# EAGLE board CT_schematic (EAGLE 7.6.0)

Size 100 x 80 mm. Coordinates in mm from the lower left corner, seen from the top.
Outline: 0,0 100,0 100,80 0,80 0,0
Copper layers (1*16): Top 0.035mm / dielectric 1.5mm / Bottom 0.035mm
Design rules "default": minimum track width 10mil, minimum drill 24mil, track to track 8mil, track to pad 8mil, pad to pad 8mil, via to via 8mil, smd to smd 8mil, copper to edge 40mil, drill to drill 8mil, minimum pad ring 10mil, minimum via ring 8mil, stop-mask expansion 4mil, vias tented up to drill 0mil, thermal gap 10mil

## Footprints (pad centres in the part's own frame; a part is rotated, then mirrored left to right if it is on the bottom)
C0603 = smd 0.8 x 0.8: 1 -0.762,0; 2 0.762,0
C0402 = smd 0.5 x 0.5: 1 -0.508,0; 2 0.508,0
EXV-9B = smd 2.718 x 1.778: 1 -2.108,0; 2 2.108,0
EXV-9H = smd 3.505 x 1.676: 1 -2.857,0; 2 2.857,0
L0603 = smd 0.8 x 0.8: 1 -0.762,0; 2 0.762,0
PJ-037B_PACKAGE = drill 3.7 square: 1 12,0 | drill 3.2 square: 2 6,0
R0603 = smd 0.8 x 0.8: 1 -0.762,0; 2 0.762,0
UFQFPN32 = smd 0.6 x 0.3: 1 -2.35,1.75; 2 -2.35,1.25; 3 -2.35,0.75; 4 -2.35,0.25; 5 -2.35,-0.25; 6 -2.35,-0.75; 7 -2.35,-1.25; 8 -2.35,-1.75; 17 2.35,-1.75; 18 2.35,-1.25; 19 2.35,-0.75; 20 2.35,-0.25; 21 2.35,0.25; 22 2.35,0.75; 23 2.35,1.25; 24 2.35,1.75 | smd 0.3 x 0.6: 9 -1.75,-2.35; 10 -1.25,-2.35; 11 -0.75,-2.35; 12 -0.25,-2.35; 13 0.25,-2.35; 14 0.75,-2.35; 15 1.25,-2.35; 16 1.75,-2.35; 25 1.75,2.35; 26 1.25,2.35; 27 0.75,2.35; 28 0.25,2.35; 29 -0.25,2.35; 30 -0.75,2.35; 31 -1.25,2.35; 32 -1.75,2.35 | smd 3.45 x 3.45: EPAD 0,0
SOIC-8 = smd 1.6 x 0.6: 1 -2.7,1.905 | smd 1.55 x 0.6: 2 -2.7,0.635; 3 -2.7,-0.635; 4 -2.7,-1.905; 5 2.7,-1.905; 6 2.7,-0.635; 7 2.7,0.635; 8 2.7,1.905
SAMTEC_FTSH-105-01-L-DV-K = smd 0.762 x 2.794: 1 -2.54,-2.032; 2 -2.54,2.032; 3 -1.27,-2.032; 4 -1.27,2.032; 5 0,-2.032; 6 0,2.032; 7 1.27,-2.032; 8 1.27,2.032; 9 2.54,-2.032; 10 2.54,2.032
TDFN-8/6MM = smd 0.3 x 0.75: 1 0,0; 2 0.5,0; 3 1,0; 4 1.5,0; 5 1.5,3; 6 1,3; 7 0.5,3; 8 0,3
ABS07-32.768KHZ-7-T = smd 1.1 x 2.4: 1 -2.5,0; 2 0,0
LP2954 = smd 1.6 x 0.6: 1 -2.475,1.905 | smd 1.55 x 0.6: 2 -2.475,0.635; 3 -2.475,-0.635; 4 -2.475,-1.905; 5 2.475,-1.905; 6 2.475,-0.635; 7 2.475,0.635; 8 2.475,1.905
SON-6 = smd 0.55 x 0.3: 1 -0.355,0.5 | smd 0.52 x 0.3: 2 -0.37,0; 3 -0.37,-0.5; 4 0.37,-0.5; 5 0.37,0; 6 0.37,0.5
SW_4-1437565-2 = smd 1.4 x 2.1: 1 -2.23,4.55; 2 -2.23,-4.55; 3 2.23,4.55; 4 2.23,-4.55
LGM67K-G1J2-24-Z = smd 0.8 x 1.4: A -2,0; C 0,0
NC7SZ125M5X = smd 1.3 x 0.7: 1 -1.3,0.95; 2 -1.3,0; 3 -1.3,-0.95; 4 1.3,-0.95; 5 1.3,0.95

## Placement (x,y rotation side)
C1  1e-07  [C0603]  -38.1,58.42 0 top  (outside the outline)
C2  1e-07  [C0603]  -41.91,58.42 0 top  (outside the outline)
C3  1e-07  [C0603]  -45.72,58.42 0 top  (outside the outline)
C4  1e-07  [C0603]  -49.53,58.42 0 top  (outside the outline)
C5  4.7e-06  [C0603]  -34.29,58.42 0 top  (outside the outline)
C6  1e-07  [C0603]  -53.34,58.42 0 top  (outside the outline)
C7  1e-08  [C0603]  -57.15,58.42 0 top  (outside the outline)
C8  1e-06  [C0603]  -60.96,58.42 0 top  (outside the outline)
C9  1e-11  [C0402]  -38.1,63.5 0 top  (outside the outline)
C10  1e-11  [C0402]  -41.91,63.5 0 top  (outside the outline)
C11  1e-08  [C0402]  -45.72,63.5 0 top  (outside the outline)
C12  1e-07  [C0402]  -49.53,63.5 0 top  (outside the outline)
C13  1e-08  [C0402]  -53.34,63.5 0 top  (outside the outline)
C14  1e-06  [EXV-9B]  -60.96,39.37 0 top  (outside the outline)
C15  2.2e-06  [EXV-9B]  -16.51,46.99 0 top  (outside the outline)
C16  1e-07  [C0402]  -57.15,63.5 0 top  (outside the outline)
C17  0.0001  [EXV-9H]  -52.07,30.48 0 top  (outside the outline)
C18  0.0001  [EXV-9H]  -17.78,40.64 0 top  (outside the outline)
C19  1e-08  [C0402]  -60.96,63.5 0 top  (outside the outline)
C20  1e-08  [C0402]  -64.77,63.5 0 top  (outside the outline)
F1  240.0  [L0603]  -64.77,58.42 0 top  (outside the outline)
J1  PJ-037B  [PJ-037B_PACKAGE]  -57.15,7.62 0 top  (outside the outline)
R1  10000.0  [R0603]  -62.23,46.99 0 top  (outside the outline)
R2  1000.0  [R0603]  -15.24,63.5 0 top  (outside the outline)
R3  910.0  [R0603]  -19.05,63.5 0 top  (outside the outline)
R4  4700.0  [R0603]  -22.86,63.5 0 top  (outside the outline)
R5  2200.0  [R0603]  -26.67,63.5 0 top  (outside the outline)
R6  2200.0  [R0603]  -30.48,63.5 0 top  (outside the outline)
R7  10000.0  [R0603]  -15.24,53.34 0 top  (outside the outline)
R8  10000.0  [R0603]  -20.32,53.34 0 top  (outside the outline)
R9  10000.0  [R0603]  -25.4,53.34 0 top  (outside the outline)
R10  10000.0  [R0603]  -30.48,53.34 0 top  (outside the outline)
R11  10000.0  [R0603]  -35.56,53.34 0 top  (outside the outline)
R12  10000.0  [R0603]  -40.64,53.34 0 top  (outside the outline)
R13  10000.0  [R0603]  -45.72,53.34 0 top  (outside the outline)
R14  5.0  [R0603]  -34.29,63.5 0 top  (outside the outline)
R15  10000.0  [R0603]  -50.8,53.34 0 top  (outside the outline)
R16  10000.0  [R0603]  -55.88,53.34 0 top  (outside the outline)
R17  10000.0  [R0603]  -60.96,53.34 0 top  (outside the outline)
R18  100000.0  [R0603]  -36.83,46.99 0 top  (outside the outline)
R19  100000.0  [R0603]  -41.91,46.99 0 top  (outside the outline)
R20  47000.0  [R0603]  -15.24,58.42 0 top  (outside the outline)
R21  100000.0  [R0603]  -46.99,46.99 0 top  (outside the outline)
R22  10000.0  [R0603]  -20.32,58.42 0 top  (outside the outline)
R23  10000.0  [R0603]  -25.4,58.42 0 top  (outside the outline)
R24  82000.0  [R0603]  -30.48,58.42 0 top  (outside the outline)
R25  300000.0  [R0603]  -52.07,46.99 0 top  (outside the outline)
R26  120000.0  [R0603]  -57.15,46.99 0 top  (outside the outline)
U1  STM32L071KZU6  [UFQFPN32]  -44.45,19.05 0 top  (outside the outline)
U2  AT25640B-SSHL-T  [SOIC-8]  -41.91,31.75 0 top  (outside the outline)
U3  FTSH-105-01-L-DV-K  [SAMTEC_FTSH-105-01-L-DV-K]  -35.56,7.62 0 top  (outside the outline)
U4  24AA128T-I/MNY  [TDFN-8/6MM]  -59.69,19.05 0 top  (outside the outline)
U5  ABS07-32.768KHZ-7-T  [ABS07-32.768KHZ-7-T]  -39.37,40.64 0 top  (outside the outline)
U6  LP2954AIMX/NOPB  [LP2954]  -25.4,31.75 0 top  (outside the outline)
U7  TPS3895ADRYR  [SON-6]  -13.97,67.31 0 top  (outside the outline)
U8  4-1437565-2  [SW_4-1437565-2]  -27.94,20.32 0 top  (outside the outline)
U9  Q65110A2395  [LGM67K-G1J2-24-Z]  -48.26,39.37 0 top  (outside the outline)
U10  nc7sz125m5x  [NC7SZ125M5X]  -24.13,46.99 0 top  (outside the outline)
U11  nc7sz125m5x  [NC7SZ125M5X]  -30.48,46.99 0 top  (outside the outline)

## Library data of the parts
C1-C20 F1 J1 R1-R26 U1-U11 = circuit_tree

## Nets
CLK_CRYSTAL_U1_1: C9.1 U1.1 U5.1
CLK_CRYSTAL_U1_2: C10.1 U1.2 U5.2
GND: C1.2 C2.2 C3.2 C4.2 C5.2 C6.2 C7.2 C8.2 C9.2 C10.2 C11.2 C12.2 C13.2 C14.2 C15.2 C16.2 C17.2 C18.2 C19.2 C20.2 J1.2 R2.2 R7.2 R14.2 R15.2 R17.2 R21.2 R24.2 R26.2 U1.4 U1.16 U1.31 U1.EPAD U2.4 U3.3 U3.5 U4.4 U4.7 U6.4 U7.2 U9.C U10.2 U10.3 U11.1 U11.3
NET_U1_3: R4.1 U1.3 U11.4
NET_U1_5: C7.1 C8.1 F1.1 U1.5
NET_U1_19: R5.1 U1.19 U4.6
NET_U1_20: R6.1 U1.20 U4.5
NET_U1_28: R3.1 U1.28 U9.A
NET_U1_29: R1.1 U1.29 U8.3 U8.4
NET_U1_30: R7.1 U1.30
NET_U2_3: R8.1 U2.3
NET_U2_7: R10.1 U2.7
NET_U3_9: R14.1 U3.9
NET_U4_1: R15.1 U4.1
NET_U4_2: R16.1 U4.2
NET_U4_3: R17.1 U4.3
NET_U6_3: R19.1 U6.3
NET_U6_5: R18.1 U6.5
NET_U6_7: R20.2 R21.1 U6.7
NET_U7_1: R23.1 R24.1 U7.1
NET_U7_3: R25.2 R26.1 U7.3
NET_U7_4: R22.1 U7.4 U10.4 U11.2
NET_U8_1: R2.1 U8.1 U8.2
PROC_SPI1_MISO: U1.12 U2.2
PROC_SPI1_MOSI: U1.13 U2.5
PROC_SPI1_NSS: R9.1 U1.10 U2.1
PROC_SPI1_SCK: U1.11 U2.6
PROC_SYS_SWCLK: R12.1 U1.25 U3.4
PROC_SYS_SWDIO: R13.1 U1.23 U3.2
RST_OUT_U3_JTAG_RST_B: R11.1 U3.10 U10.1
VCC_S1_4V7: C14.1 C17.1 C18.1 J1.1 R19.2 U6.8
VCC_TIER1_1V8: C1.1 C2.1 C3.1 C4.1 C5.1 C6.1 C11.1 C12.1 C13.1 C15.1 C16.1 C19.1 C20.1 F1.2 R1.2 R3.2 R4.2 R5.2 R6.2 R8.2 R9.2 R10.2 R11.2 R12.2 R13.2 R16.2 R18.2 R20.1 R22.2 R23.2 R25.1 U1.17 U1.24 U1.32 U2.8 U3.1 U4.8 U6.1 U7.6 U10.5 U11.5

## Tracks (layer width: path | path; a pad name or v marks a point on that pad's centre or on a via)
CLK_CRYSTAL_U1_1  (2 unrouted)
CLK_CRYSTAL_U1_2  (2 unrouted)
GND  (44 unrouted)
NET_U1_3  (2 unrouted)
NET_U1_5  (3 unrouted)
NET_U1_19  (2 unrouted)
NET_U1_20  (2 unrouted)
NET_U1_28  (2 unrouted)
NET_U1_29  (3 unrouted)
NET_U1_30  (1 unrouted)
NET_U2_3  (1 unrouted)
NET_U2_7  (1 unrouted)
NET_U3_9  (1 unrouted)
NET_U4_1  (1 unrouted)
NET_U4_2  (1 unrouted)
NET_U4_3  (1 unrouted)
NET_U6_3  (1 unrouted)
NET_U6_5  (1 unrouted)
NET_U6_7  (2 unrouted)
NET_U7_1  (2 unrouted)
NET_U7_3  (2 unrouted)
NET_U7_4  (3 unrouted)
NET_U8_1  (2 unrouted)
PROC_SPI1_MISO  (1 unrouted)
PROC_SPI1_MOSI  (1 unrouted)
PROC_SPI1_NSS  (2 unrouted)
PROC_SPI1_SCK  (1 unrouted)
PROC_SYS_SWCLK  (2 unrouted)
PROC_SYS_SWDIO  (2 unrouted)
RST_OUT_U3_JTAG_RST_B  (2 unrouted)
VCC_S1_4V7  (5 unrouted)
VCC_TIER1_1V8  (40 unrouted)